# Altium PCB Adattatore.PcbDoc
Units mm, origin at the board's own origin, x right, y up, seen from the top; angles counter-clockwise.
Board outline 89.07 x 85.98 mm, 2 copper layers (Top Layer, Bottom Layer); 14 components, 67 nets, 170 pads, 25 vias.
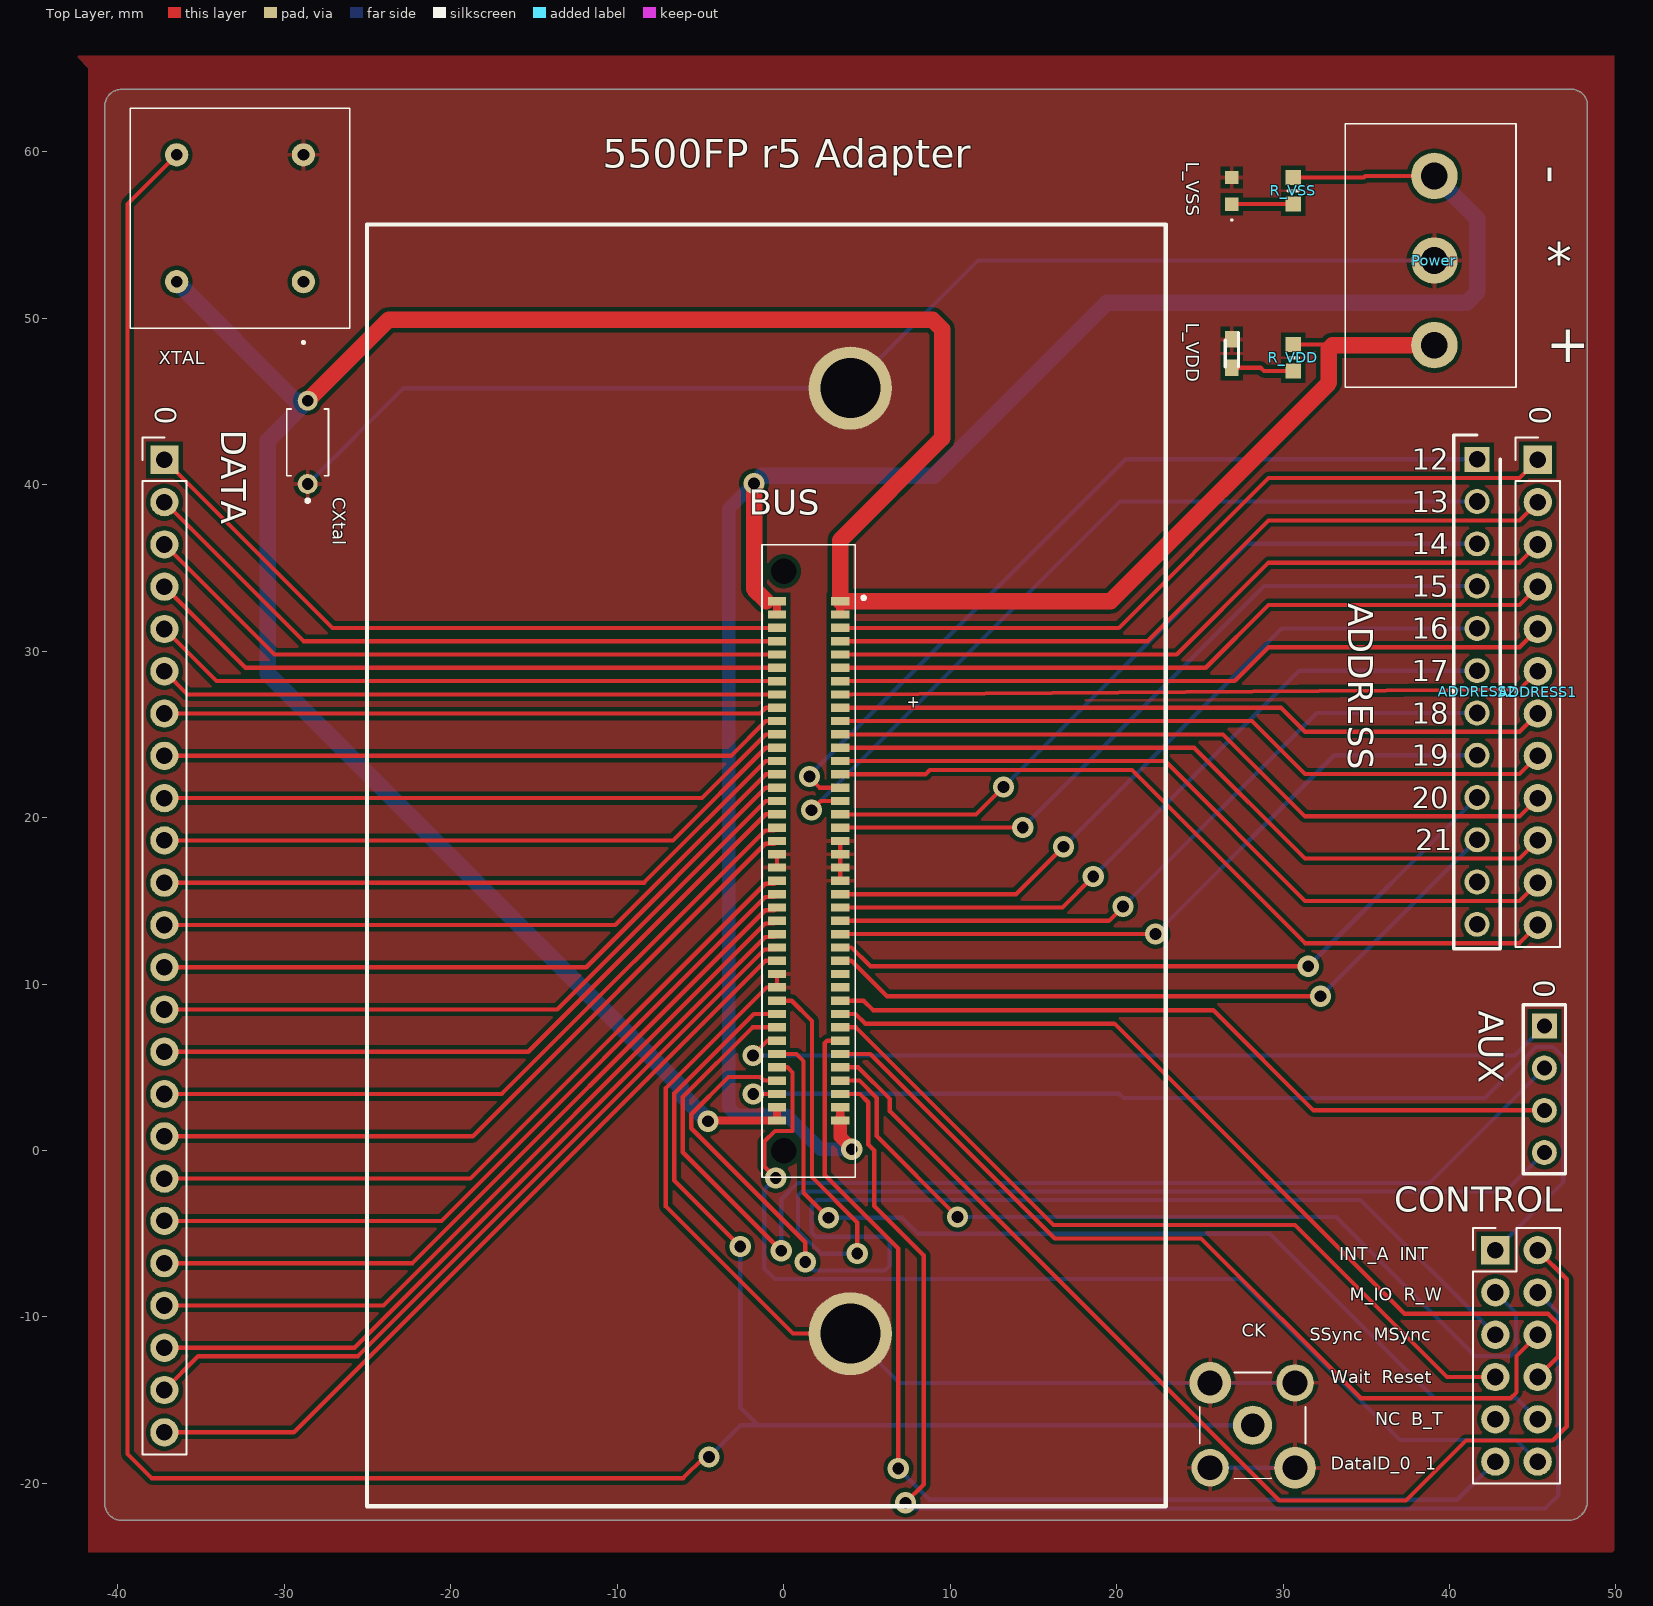
[diagram p0: Top Layer view]
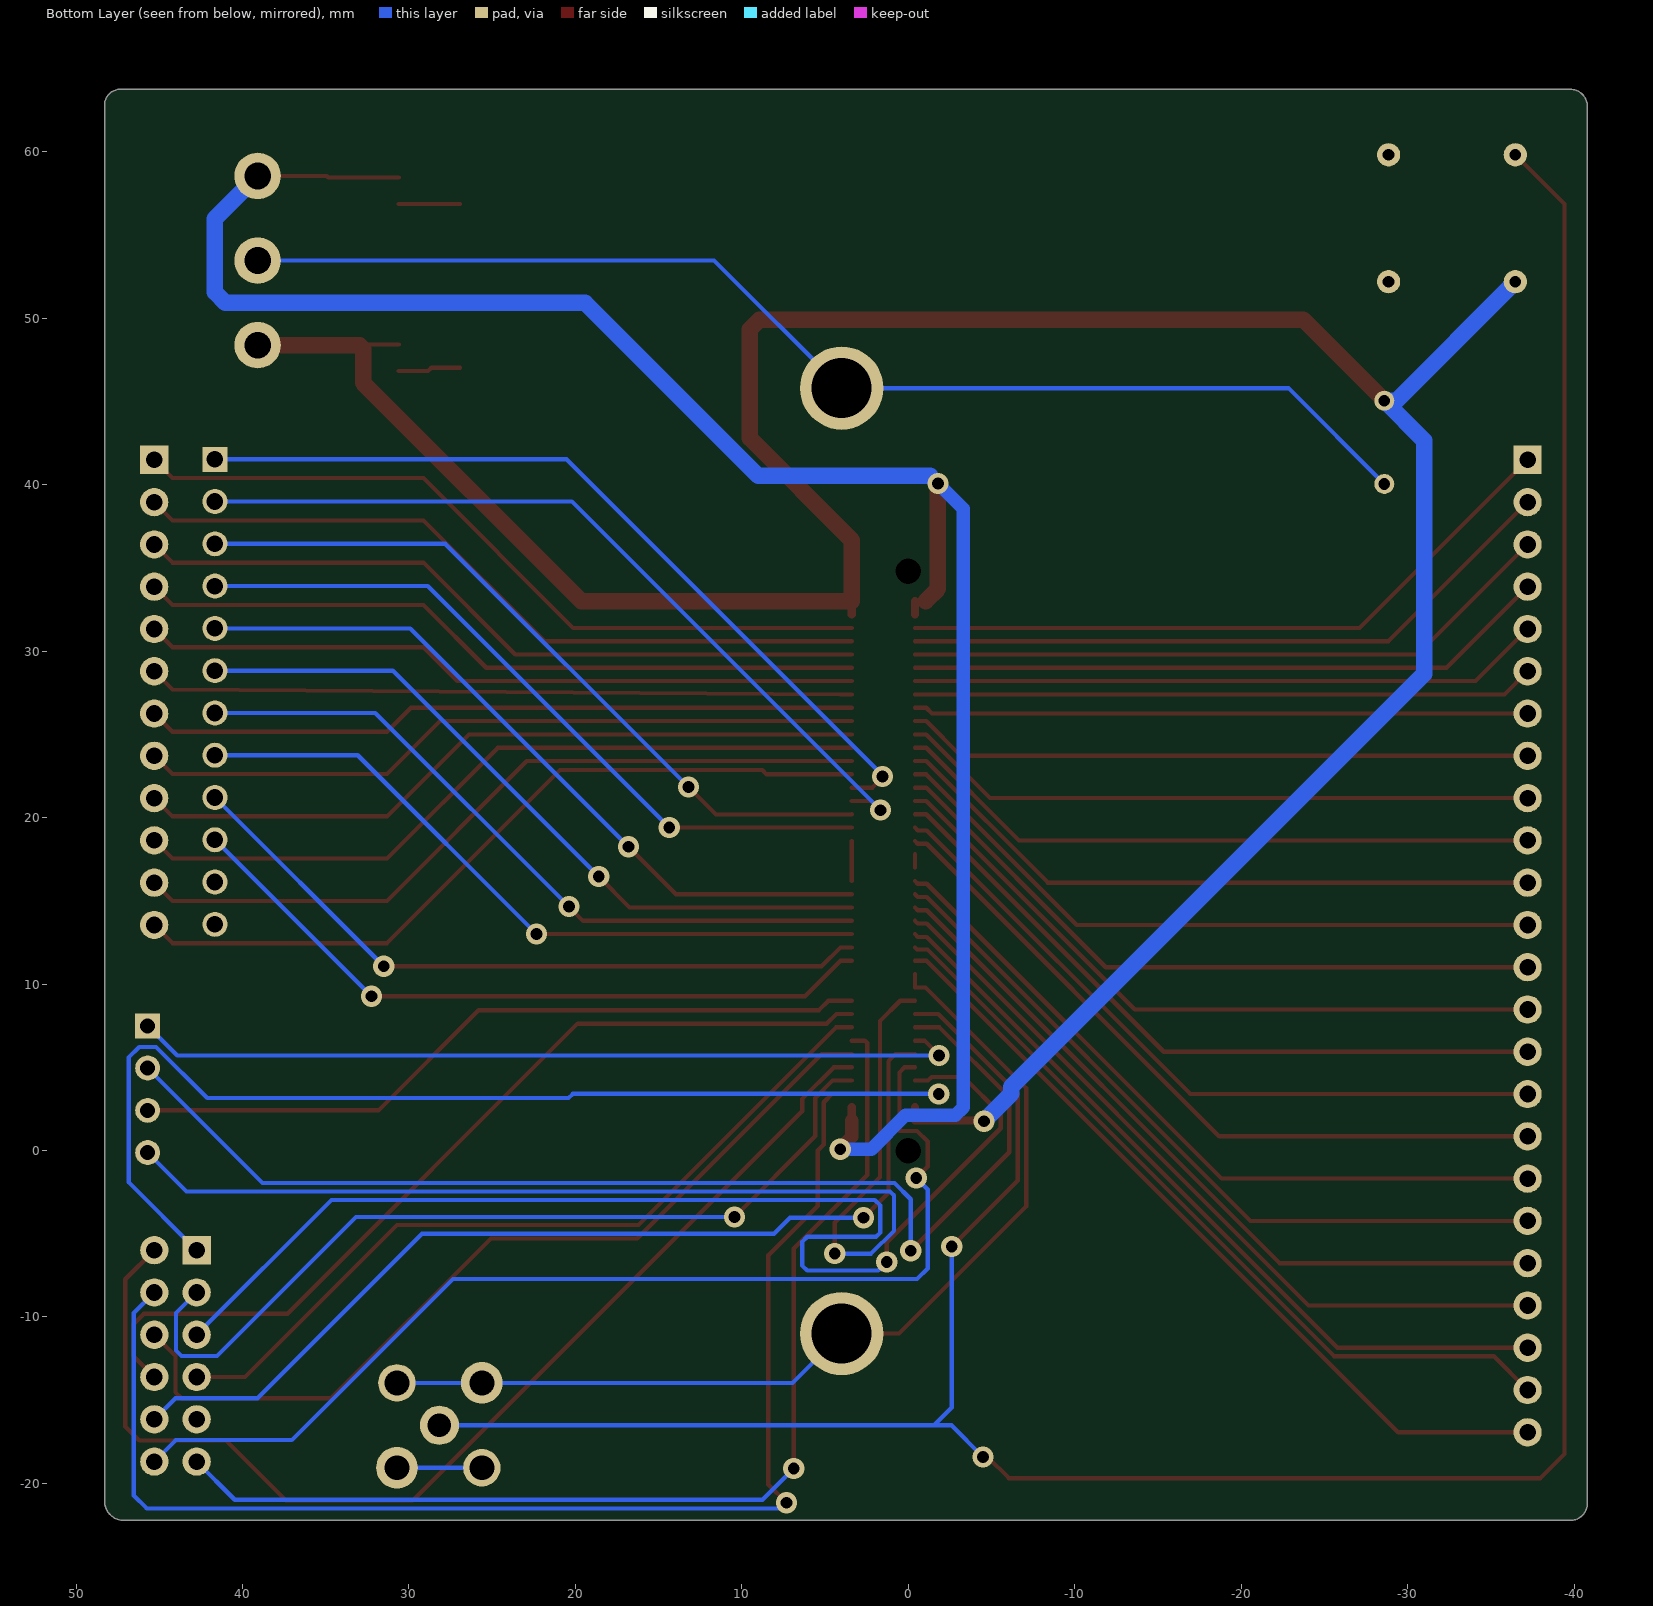
[diagram p1: Bottom Layer view, seen from below]
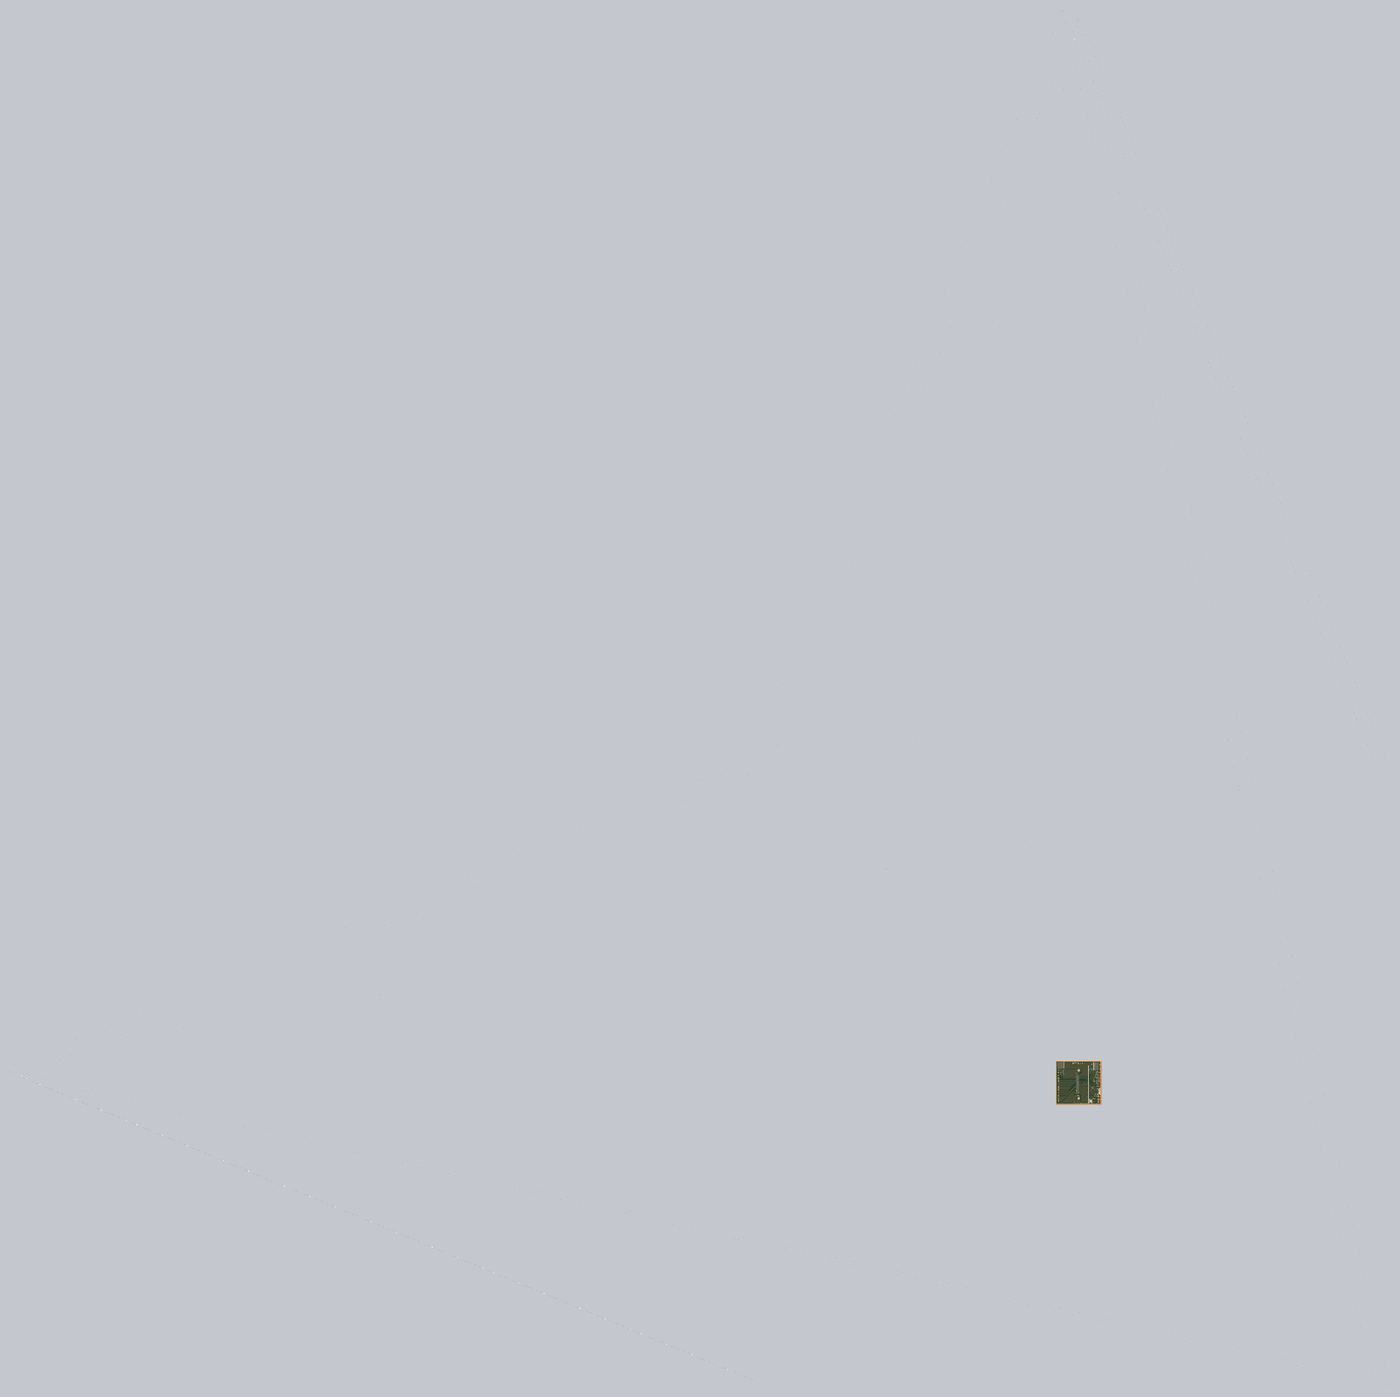
[diagram p2: 3D render of the assembled board from above, using the file's embedded part models]

## Layer stack, top to bottom
Top Solder: solder mask 0.0102, Solder Resist, Dk 3.5
Top Layer: signal copper 0.0356
Dielectric 1: dielectric 0.32, FR-4, Dk 4.8
Bottom Layer: signal copper 0.0356
Bottom Solder: solder mask 0.0102, Solder Resist, Dk 3.5

## Board outline
-40.791,-21.208 -40.791,62.739 cw(c-39.775,62.739) -39.775,63.755 47.225,63.755 cw(c47.332,62.811) 48.276,62.919 48.276,-21.081 cw(c47.133,-21.081) 47.133,-22.224 47.225,-22.224 -39.775,-22.224 cw(c-39.775,-21.208)

## Design rules (kind name [scope] priority, off if disabled: settings)
Clearance [All] p1: gap=0.254 ignorepadtopadclearanceinfootprint=FALSE
MinimumSolderMaskSliver [All] p1: minsoldermaskwidth=0.127
PolygonConnect [All] p1: connectstyle=Relief reliefconductorwidth=0.254 reliefentries=4 polygonreliefangle="90 Angle" airgapwidth=0.254
RoutingTopology [All] p1: topology=Horizontal
RoutingVias [All] p1: holewidth=0.711 width=1.27 viastyle="Through Hole" minholewidth=0.711 minwidth=1.27 maxholewidth=0.711 maxwidth=1.27
SilkToSolderMaskClearance [IsPad] p1: minsilkscreentomaskgap=0.127 clearancetoexposedcopper=TRUE
SolderMaskExpansion [All] p1: expansion=0.102 istentingtop=FALSE
Width [All] p1: maxlimit=0.254 minlimit=0.254 preferedwidth=0.254
27 further rules are at their usual default settings.

## Components (designator, comment, footprint, x,y, rotation, side; value= is the part's Value field where it differs from the comment)
ADDRESS1 "Address BUS" PinHeader_1x12_P2.54mm_Vertical 45.303,41.492 r0 top locked
ADDRESS2 "2312-6111TG" HDRV12W82P0X254_1X12_3048X254X864P 41.656,41.529 r270 top locked
AUX "Header 4" HDR1X4 45.696,7.494 r270 top
BUS "ER8-80P-0.8SV-5H" ER880P08SV5H 1.5,17.4 r270 top
CK "1-1478979-0" 114789790 28.17,-16.522 r0 top
CONTROL "CTRL BUS" PinHeader_2x06_P2.54mm_Vertical 42.753,-5.988 r0 top
CXtal "FA28X8R1E104KNU00" FA28C0G1H822JNU00 -28.599,42.546 r90 top
DATA "Data BUS" PinHeader_1x24_P2.54mm_Vertical -37.207,41.492 r0 top
L_VDD "150060VS55040" LEDM168X50N 26.924,47.879 r270 top
L_VSS "150060SS75003" 150060SS75003 26.924,57.658 r90 top
Power "TB007-508-03BE" TB00750803BE 39.092,48.388 r90 top
R_VDD "CRCW06031K00JNEAC" RESC1608X55N 30.607,47.625 r270 top
R_VSS "CRCW06031K00JNEAC" RESC1608X55N 30.607,57.658 r270 top
XTAL "MXO45HS-3C-25M0000" MXO45HS3C25M0000 -28.853,52.198 r90 top

## Footprints (in the part's own frame and the unit in brackets; to place one, negate y for a bottom-side part, rotate by r counter-clockwise, add the part's x,y. Pads: shape width x height; smd on the part's side, far side on the other; paste and mask are expansions set on the pad)
150060SS75003 [mm]
  rect 0.8x0.8 smd: 1(-0.8,0) 2(0.8,0)
  silkscreen extent -1.8,-0.05 -1.7,0.05, body extent -0.8,-0.4 0.8,0.4, height 0.9
114789790 [mm]
  round 2.504 hole 1.5: 1(-2.55,2.563) 3(2.55,-2.537)
  round 2.25 hole 1.5: 2(2.55,2.563) 4(-2.55,-2.537)
  round 2.354 hole 1.4: 5(0,0.013)
  silkscreen extent -3.17,-3.19 3.18,3.19, body extent -3.17,-3.17 3.17,3.18, height 9.52
ER880P08SV5H [mm]
  rect 0.5x1.1 smd: 1(-15.6,1.9) 2(-15.6,-1.9) 3(-14.8,1.9) 4(-14.8,-1.9) 5(-14,1.9) 6(-14,-1.9) 7(-13.2,1.9) 8(-13.2,-1.9) 9(-12.4,1.9) 10(-12.4,-1.9) 11(-11.6,1.9) 12(-11.6,-1.9) 13(-10.8,1.9) 14(-10.8,-1.9) 15(-10,1.9) 16(-10,-1.9) 17(-9.2,1.9) 18(-9.2,-1.9) 19(-8.4,1.9) 20(-8.4,-1.9) 21(-7.6,1.9) 22(-7.6,-1.9) 23(-6.8,1.9) 24(-6.8,-1.9) 25(-6,1.9) 26(-6,-1.9) 27(-5.2,1.9) 28(-5.2,-1.9) 29(-4.4,1.9) 30(-4.4,-1.9) 31(-3.6,1.9) 32(-3.6,-1.9) 33(-2.8,1.9) 34(-2.8,-1.9) 35(-2,1.9) 36(-2,-1.9) 37(-1.2,1.9) 38(-1.2,-1.9) 39(-0.4,1.9) 40(-0.4,-1.9) 41(0.4,1.9) 42(0.4,-1.9) 43(1.2,1.9) 44(1.2,-1.9) 45(2,1.9) 46(2,-1.9) 47(2.8,1.9) 48(2.8,-1.9) 49(3.6,1.9) 50(3.6,-1.9) 51(4.4,1.9) 52(4.4,-1.9) 53(5.2,1.9) 54(5.2,-1.9) 55(6,1.9) 56(6,-1.9) 57(6.8,1.9) 58(6.8,-1.9) 59(7.6,1.9) 60(7.6,-1.9) 61(8.4,1.9) 62(8.4,-1.9) 63(9.2,1.9) 64(9.2,-1.9) 65(10,1.9) 66(10,-1.9) 67(10.8,1.9) 68(10.8,-1.9) 69(11.6,1.9) 70(11.6,-1.9) 71(12.4,1.9) 72(12.4,-1.9) 73(13.2,1.9) 74(13.2,-1.9) 75(14,1.9) 76(14,-1.9) 77(14.8,1.9) 78(14.8,-1.9) 79(15.6,1.9) 80(15.6,-1.9)
  round 0.765 hole 1.53 unplated: 81(-17.4,-1.5) 82(17.4,-1.5)
  silkscreen extent -19,-2.8 19,3.4, body extent -19,-2.8 19,2.8, height 9.01
FA28C0G1H822JNU00 [mm]
  round 1.2 hole 0.7: 1(-2.5,0) 2(2.5,0)
  silkscreen extent -3.6,-1.25 2,1.25, body extent -2.75,-1.25 2.75,1.25, height 5.6
HDR1X4 [mm] "Connector; Header; 4 Position"
  rect 1.5x1.5 hole 0.9: 1(0,0)
  round 1.5 hole 0.9: 2(2.54,0) 3(5.08,0) 4(7.62,0)
  silkscreen extent -1.27,-1.27 8.89,1.27
HDRV12W82P0X254_1X12_3048X254X864P [mm]
  rect 1.5x1.5 hole 1: 1(0,0)
  round 1.5 hole 1: 2(2.54,0) 3(5.08,0) 4(7.62,0) 5(10.16,0) 6(12.7,0) 7(15.24,0) 8(17.78,0) 9(20.32,0) 10(22.86,0) 11(25.4,0) 12(27.94,0)
  silkscreen extent -1.46,-1.4 29.4,1.4, body extent -1.27,-1.27 29.21,1.27, height 8.64
LEDM168X50N [mm]
  rect 1x0.8 smd: 1(-0.85,0) 2(0.85,0)
  silkscreen extent -1.25,-0.4 0.8,0.4, body extent -0.8,-0.4 0.8,0.4, height 0.4
MXO45HS3C25M0000 [mil]
  round 55 hole 27.56: 1(0,0) 4(300,0) 5(300,300) 8(0,300)
  silkscreen extent -146,-110 410,410, body extent -110,-110 410,410, height 205
PinHeader_1x12_P2.54mm_Vertical [mm]
  rect 1.7x1.7 hole 1 paste-1.7 mask+0: 1(0,0)
  rrect100% 1.7x1.7 hole 1 paste-1.7 mask+0: 2(0,-2.54) 3(0,-5.08) 4(0,-7.62) 5(0,-10.16) 6(0,-12.7) 7(0,-15.24) 8(0,-17.78) 9(0,-20.32) 10(0,-22.86) 11(0,-25.4) 12(0,-27.94)
  silkscreen extent -1.33,-29.27 1.33,1.33
PinHeader_1x24_P2.54mm_Vertical [mm]
  rect 1.7x1.7 hole 1 paste-1.7 mask+0: 1(0,0)
  rrect100% 1.7x1.7 hole 1 paste-1.7 mask+0: 2(0,-2.54) 3(0,-5.08) 4(0,-7.62) 5(0,-10.16) 6(0,-12.7) 7(0,-15.24) 8(0,-17.78) 9(0,-20.32) 10(0,-22.86) 11(0,-25.4) 12(0,-27.94) 13(0,-30.48) 14(0,-33.02) 15(0,-35.56) 16(0,-38.1) 17(0,-40.64) 18(0,-43.18) 19(0,-45.72) 20(0,-48.26) 21(0,-50.8) 22(0,-53.34) 23(0,-55.88) 24(0,-58.42)
  silkscreen extent -1.33,-59.75 1.33,1.33
PinHeader_2x06_P2.54mm_Vertical [mm]
  rect 1.7x1.7 hole 1 paste-1.7 mask+0: 1(0,0)
  rrect100% 1.7x1.7 hole 1 paste-1.7 mask+0: 2(2.54,0) 3(0,-2.54) 4(2.54,-2.54) 5(0,-5.08) 6(2.54,-5.08) 7(0,-7.62) 8(2.54,-7.62) 9(0,-10.16) 10(2.54,-10.16) 11(0,-12.7) 12(2.54,-12.7)
  silkscreen extent -1.33,-14.03 3.87,1.33
RESC1608X55N [mm]
  rect 0.9x0.95 smd: 1(-0.8,0) 2(0.8,0)
  silkscreen extent 0,-0.3 0,0.3, body extent -0.8,-0.4 0.8,0.4, height 0.55
TB00750803BE [mil]
  round 110 hole 62.99: 1(0,0) 2(200,0) 3(400,0)
  silkscreen extent -100,-193 524,211, body extent -100,-193 524,211, height 571

## Part data
ADDRESS1: library part Conn_01x12
ADDRESS2: "Connector", Manufacturer_Name=3M, Mouser Part Number=517-2312-6111TG, Arrow Part Number=2312-6111TG, Arrow Price/Stock=https://www.arrow.com/en/products/2312-6111-tg/3m, Datasheet Link=https://multimedia.3m.com/mws/media/22434O/3mtm-100-in-pin-strip-hdr-straight-ra-solder-tail-ts0766.pdf, Height=8.636mm, Manufacturer_Part_Number=2312-6111TG, Mouser Price/Stock=https://www.mouser.co.uk/ProductDetail/3M-Electronic-Solutions-Division/2312-6111TG?qs=kc%2FM%2FrumzCWny2wIl4PkcA%3D%3D
AUX: "Header, 4-Pin", LatestRevisionDate=17-Jul-2002, LatestRevisionNote="Re-released for DXP Platform.", Publisher="Altium Limited"
BUS: "Connector", Manufacturer_Name=Hirose, Mouser Part Number=798-ER8-80P-0.8SV-5H, Datasheet Link=https://www.hirose.com/product/en/download_file/key_name/ER8-80P-0.8SV-5H/category/Drawing%20(2D)/doc_file_id/142172/?file_category_id=6&item_id=06250029000&is_series=, Height=8.905mm, Manufacturer_Part_Number=ER8-80P-0.8SV-5H, Mouser Price/Stock=https://www.mouser.com/Search/Refine.aspx?Keyword=798-ER8-80P-0.8SV-5H
CK: "Connector", Manufacturer_Name="TE Connectivity", Mouser Part Number=571-1-1478979-0, Arrow Part Number=1-1478979-0, Arrow Price/Stock=https://www.arrow.com/en/products/1-1478979-0/te-connectivity, Datasheet Link=http://www.te.com/commerce/DocumentDelivery/DDEController?Action=showdoc&DocId=Customer+Drawing%7F1478979%7FB%7Fpdf%7FEnglish%7FENG_CD_1478979_B.pdf%7F1-1478979-0, Height=10mm, Manufacturer_Part_Number=1-1478979-0, Mouser Price/Stock=https://www.mouser.co.uk/ProductDetail/TE-Connectivity/1-1478979-0?qs=Vcr9%2FL0R50jLfIYfi0kfuw%3D%3D
CONTROL: library part Conn_02x06_Odd_Even, CONTROL="CTRL BUS"
CXtal: "Capacitor", Manufacturer_Name=TDK, Mouser Part Number=810-FA28X8R1E10400, Datasheet Link=https://product.tdk.com/info/en/catalog/datasheets/leadmlcc_halogenfree_fa150_en.pdf, Height=5.5mm, Manufacturer_Part_Number=FA28X8R1E104KNU00, Mouser Price/Stock=https://www.mouser.co.uk/ProductDetail/TDK/FA28X8R1E104KNU00?qs=zFwFjAF3uahucuORXrjx8w%3D%3D
DATA: library part Conn_01x24
L_VDD: "LED", Manufacturer_Name="Wurth Elektronik", Mouser Part Number=710-150060VS55040, Datasheet Link=https://katalog.we-online.com/led/datasheet/150060VS55040.pdf, Height=0.5mm, Manufacturer_Part_Number=150060VS55040, Mouser Price/Stock=https://www.mouser.co.uk/ProductDetail/Wurth-Elektronik/150060VS55040?qs=8Aam6%252B7C6HEumg%252B0cJZzvA%3D%3D
L_VSS: "LED", Manufacturer_Name="Wurth Elektronik", Mouser Part Number=710-150060SS75003, Datasheet Link=https://www.we-online.com/catalog/datasheet/150060SS75003.pdf, Height=0.8mm, Manufacturer_Part_Number=150060SS75003, Mouser Price/Stock=https://www.mouser.co.uk/ProductDetail/Wurth-Elektronik/150060SS75003?qs=Li%252BoUPsLEntNiRmIe%252Bnzlg%3D%3D
Power: "Connector", Manufacturer_Name="CUI Inc.", Mouser Part Number=490-TB007-508-03BE, Arrow Part Number=TB007-508-03BE, Arrow Price/Stock=https://www.arrow.com/en/products/tb007-508-03be/cui-devices?region=nac, Datasheet Link=https://eu.mouser.com/datasheet/2/670/tb007_508-1550621.pdf, Height=14.4mm, Manufacturer_Part_Number=TB007-508-03BE, Mouser Price/Stock=https://www.mouser.co.uk/ProductDetail/CUI-Devices/TB007-508-03BE?qs=vLWxofP3U2zHYiGqNs1vAA%3D%3D
R_VDD R_VSS: "Resistor", Manufacturer_Name=Vishay, Mouser Part Number=71-CRCW06031K00JNEAC, Arrow Part Number=CRCW06031K00JNEAC, Arrow Price/Stock=https://www.arrow.com/en/products/crcw06031k00jneac/vishay?region=nac, Datasheet Link=http://www.vishay.com/docs/28773/crcwce3.pdf, Height=0.55mm, Manufacturer_Part_Number=CRCW06031K00JNEAC, Mouser Price/Stock=https://www.mouser.co.uk/ProductDetail/Vishay-Dale/CRCW06031K00JNEAC?qs=E3Y5ESvWgWPM5t3DlmyFHQ%3D%3D
XTAL: "Crystal or Oscillator", Manufacturer_Name=CTS, Mouser Part Number=774-MXO45HS-3C-25.0, Arrow Part Number=MXO45HS-3C-25M0000, Arrow Price/Stock=https://www.arrow.com/en/products/mxo45hs-3c-25m0000/cts, Datasheet Link=http://www.ctscorp.com/wp-content/uploads/MXO45.pdf, Height=5.1mm, Manufacturer_Part_Number=MXO45HS-3C-25M0000, Mouser Price/Stock=https://www.mouser.com/Search/Refine.aspx?Keyword=774-MXO45HS-3C-25.0

## Free pads (board coordinates)
  round 5 hole 3.6: 12(4,-11) 12(4,45.8)

## Via types
v1: diameter 1.27, hole 0.711, Top Layer to Bottom Layer, 25 vias

## Nets (pads, with @x,y where several pads share a name; then routed paths per layer and width w, separated by ;. In a path a pad name is that pad's centre, name@x,y a point inside that pad or via, vN(x,y) a via of type N, cw(c..) or ccw(c..) an arc to the next point about the centre after c; other vN are vias at no path point)
A0: ADDRESS1.1 BUS.5 | length 46.1
  Top Layer w0.254: BUS.5 20.134,31.4 29.132,40.398 44.208,40.398 ADDRESS1.1
A12: ADDRESS2.1 BUS.29 | length 50.3
  Top Layer w0.254: v1(1.547,22.479) 1.476,22.479 2.155,21.8 BUS.29
  Bottom Layer w0.254: v1@1.511,22.515 20.526,41.529 ADDRESS2.1
A13: ADDRESS2.2 BUS.31 | length 49.6
  Top Layer w0.254: v1(1.672,20.447) 2.225,21 BUS.31
  Bottom Layer w0.254: v1(1.672,20.447) 20.214,38.989 ADDRESS2.2
A14: ADDRESS2.3 BUS.33 | length 45
  Top Layer w0.254: BUS.33 3.407,20.193 11.558,20.193 v1(13.209,21.843)
  Bottom Layer w0.254: v1(13.209,21.843) 27.814,36.449 ADDRESS2.3
A15: ADDRESS2.4 BUS.35 | length 44.3
  Top Layer w0.254: BUS.35 v1(14.357,19.4)
  Bottom Layer w0.254: v1(14.357,19.4) 28.866,33.909 ADDRESS2.4
A21: ADDRESS2.10 BUS.55 | length 43
  Top Layer w0.254: BUS.55 4.077,11.4 6.206,9.271 v1(32.258,9.271)
  Bottom Layer w0.254: v1(32.258,9.271) ADDRESS2.10
B_T: BUS.70 CONTROL.10 | length 59.4
  Top Layer w0.254: BUS.70 0.763,5.8 1.195,5.368 1.195,-2.539 v1(2.694,-4.038)
  Bottom Layer w0.254: v1(2.694,-4.038) 7.107,-4.038 8.072,-5.003 29.211,-5.003 39.092,-14.883 44.029,-14.883 CONTROL.10
D0: BUS.6 DATA.1 | length 41
  Top Layer w0.254: DATA.1 -27.115,31.4 BUS.6
DATAID0: BUS.67 CONTROL.11 | length 66
  Top Layer w0.254: BUS.67 2.613,6.6 2.465,6.453 2.465,-1.472 6.885,-5.892 v1(6.885,-19.1)
  Bottom Layer w0.254: v1(6.885,-19.1) 8.764,-20.979 40.461,-20.979 CONTROL.11
GND: BUS.37 BUS.39 BUS.40 BUS.41 BUS.42 BUS.43 BUS.58 BUS.60 CK.1 CK.2 CK.3 CK.4 CXtal.1 L_VDD.1 L_VSS.2 pad.12 Power.2 XTAL.4 | length 140.8
  Top Layer w0.254: BUS.58 BUS.60 -1.04,9.8 -7.081,3.759 -7.081,-3.362 0.556,-11 pad.12@4,-11 ; BUS.42 BUS.40 ; BUS.43 BUS.41 BUS.39 BUS.37
  Bottom Layer w0.254: CXtal.1 -22.845,45.8 4,45.8 11.668,53.468 Power.2 ; pad.12@4,-11 6.959,-13.959 CK.1 CK.2 ; CK.4 CK.3
INT: BUS.71 CONTROL.2 | length 68
  Top Layer w0.254: BUS.71 4.472,5 6.377,3.095 6.377,2.363 29.77,-21.03 37.39,-21.03 40.997,-17.423 46.204,-17.423 47.042,-16.585 47.042,-7.737 CONTROL.2
INT_A: BUS.76 CONTROL.1 | length 65
  Top Layer w0.254: v1(-1.827,3.406) -1.825,3.403 -0.403,3.403 BUS.76
  Bottom Layer w0.254: v1(-1.827,3.406) 20.154,3.406 20.409,3.151 42.115,3.151 45.188,6.224 46.204,6.224 46.839,5.589 46.839,-1.901 CONTROL.1
M_IO: BUS.73 CONTROL.3 | length 52.9
  Top Layer w0.254: BUS.73 4.553,4.2 5.592,3.161 5.592,0.871 v1(10.45,-3.987)
  Bottom Layer w0.254: v1(10.45,-3.987) 33.174,-3.987 41.53,-12.343 43.664,-12.343 43.994,-12.013 43.994,-9.769 CONTROL.3
MSync: BUS.69 CONTROL.6 | length 53.3
  Top Layer w0.254: BUS.69 5.201,5.8 16.283,-5.282 25.071,-5.282 34.672,-14.883 43.664,-14.883 44.02,-14.528 44.02,-12.341 CONTROL.6
NetADDRESS1_2: ADDRESS1.2 BUS.7 | length 45.4
  Top Layer w0.254: BUS.7 21.874,30.6 29.132,37.858 44.208,37.858 ADDRESS1.2
NetADDRESS1_3: ADDRESS1.3 BUS.9 | length 44.6
  Top Layer w0.254: BUS.9 23.614,29.8 29.132,35.318 44.208,35.318 ADDRESS1.3
NetADDRESS1_4: ADDRESS1.4 BUS.11 | length 43.9
  Top Layer w0.254: BUS.11 25.354,29 29.132,32.778 44.208,32.778 ADDRESS1.4
NetADDRESS1_5: ADDRESS1.5 BUS.13 | length 43.2
  Top Layer w0.254: BUS.13 27.094,28.2 29.132,30.238 44.208,30.238 ADDRESS1.5
NetADDRESS1_6: ADDRESS1.6 BUS.15 | length 42.4
  Top Layer w0.254: BUS.15 4.077,27.4 44.208,27.698 ADDRESS1.6
NetADDRESS1_7: ADDRESS1.7 BUS.17 | length 43
  Top Layer w0.254: BUS.17 29.878,26.6 31.32,25.158 44.208,25.158 ADDRESS1.7
NetADDRESS1_8: ADDRESS1.8 BUS.19 | length 43.7
  Top Layer w0.254: BUS.19 28.138,25.8 31.32,22.618 44.208,22.618 ADDRESS1.8
NetADDRESS1_9: ADDRESS1.9 BUS.21 | length 44.4
  Top Layer w0.254: BUS.21 26.398,25 31.32,20.078 44.208,20.078 ADDRESS1.9
NetADDRESS1_10: ADDRESS1.10 BUS.23 | length 45.1
  Top Layer w0.254: BUS.23 24.658,24.2 31.32,17.538 44.208,17.538 ADDRESS1.10
NetADDRESS1_11: ADDRESS1.11 BUS.25 | length 45.8
  Top Layer w0.254: BUS.25 22.918,23.4 31.32,14.998 44.208,14.998 ADDRESS1.11
NetADDRESS1_12: ADDRESS1.12 BUS.27 | length 46.8
  Top Layer w0.254: BUS.27 8.515,22.6 8.774,22.859 20.919,22.859 31.32,12.458 44.208,12.458 ADDRESS1.12
NetADDRESS2_5: ADDRESS2.5 BUS.45 | length 44.9
  Top Layer w0.254: BUS.45 13.949,15.4 v1(16.801,18.251)
  Bottom Layer w0.254: v1(16.801,18.251) 29.919,31.369 ADDRESS2.5
NetADDRESS2_6: ADDRESS2.6 BUS.47 | length 44.1
  Top Layer w0.254: BUS.47 16.742,14.6 v1(18.597,16.455)
  Bottom Layer w0.254: v1(18.597,16.455) 30.971,28.829 ADDRESS2.6
NetADDRESS2_7: ADDRESS2.7 BUS.49 | length 43.4
  Top Layer w0.254: BUS.49 19.534,13.8 v1(20.393,14.659)
  Bottom Layer w0.254: v1(20.393,14.659) 32.023,26.289 ADDRESS2.7
NetADDRESS2_8: ADDRESS2.8 BUS.51 | length 42.7
  Top Layer w0.254: BUS.51 v1(22.326,13)
  Bottom Layer w0.254: v1(22.326,13) 33.075,23.749 ADDRESS2.8
NetADDRESS2_9: ADDRESS2.9 BUS.53 | length 42.9
  Top Layer w0.254: BUS.53 4.077,12.2 5.21,11.067 v1(31.514,11.067)
  Bottom Layer w0.254: v1(31.514,11.067) ADDRESS2.9
NetAUX_1: AUX.1 BUS.68 | length 50.1
  Top Layer w0.254: v1(-1.853,5.716) -0.969,6.6 BUS.68
  Bottom Layer w0.254: v1(-1.853,5.716) 43.918,5.716 AUX.1
NetAUX_2: AUX.2 BUS.66 | length 71.3
  Top Layer w0.254: BUS.66 -1.878,7.4 -6.065,3.213 -6.065,-0.105 v1(-0.151,-6.019)
  Bottom Layer w0.254: v1(-0.151,-6.019) -0.151,-2.925 0.825,-1.949 38.793,-1.949 AUX.2
NetAUX_3: AUX.3 BUS.61 | length 45
  Top Layer w0.254: BUS.61 4.802,9 5.368,8.434 25.808,8.434 31.828,2.414 AUX.3
NetAUX_4: AUX.4 BUS.62 | length 69.9
  Top Layer w0.254: BUS.62 0.484,9 1.703,7.781 1.703,-1.599 4.421,-4.317 v1(4.421,-6.197)
  Bottom Layer w0.254: v1(4.421,-6.197) 2.237,-6.197 0.865,-4.825 0.865,-2.694 1.102,-2.457 43.365,-2.457 AUX.4
NetBUS_8: BUS.8 DATA.2 | length 40.3
  Top Layer w0.254: DATA.2 -28.855,30.6 BUS.8
NetBUS_10: BUS.10 DATA.3 | length 39.5
  Top Layer w0.254: DATA.3 -30.595,29.8 BUS.10
NetBUS_12: BUS.12 DATA.4 | length 38.8
  Top Layer w0.254: DATA.4 -32.335,29 BUS.12
NetBUS_14: BUS.14 DATA.5 | length 38.1
  Top Layer w0.254: DATA.5 -34.075,28.2 BUS.14
NetBUS_16: BUS.16 DATA.6 | length 37.4
  Top Layer w0.254: DATA.6 -35.815,27.4 BUS.16
NetBUS_18: BUS.18 DATA.7 | length 37
  Top Layer w0.254: DATA.7 -1.425,26.252 -1.077,26.6 BUS.18
NetBUS_20: BUS.20 DATA.8 | length 37.7
  Top Layer w0.254: DATA.8 -3.165,23.712 -1.077,25.8 BUS.20
NetBUS_22: BUS.22 DATA.9 | length 38.4
  Top Layer w0.254: DATA.9 -4.905,21.172 -1.077,25 BUS.22
NetBUS_24: BUS.24 DATA.10 | length 39.1
  Top Layer w0.254: DATA.10 -6.645,18.632 -1.077,24.2 BUS.24
NetBUS_26: BUS.26 DATA.11 | length 39.8
  Top Layer w0.254: DATA.11 -8.385,16.092 -1.077,23.4 BUS.26
NetBUS_28: BUS.28 DATA.12 | length 40.6
  Top Layer w0.254: DATA.12 -10.125,13.552 -1.077,22.6 BUS.28
NetBUS_30: BUS.30 DATA.13 | length 41.3
  Top Layer w0.254: DATA.13 -11.865,11.012 -1.077,21.8 BUS.30
NetBUS_32: BUS.32 DATA.14 | length 42
  Top Layer w0.254: DATA.14 -13.605,8.472 -1.077,21 BUS.32
NetBUS_34: BUS.34 DATA.15 | length 42.7
  Top Layer w0.254: DATA.15 -15.345,5.932 -1.077,20.2 BUS.34
NetBUS_36: BUS.36 DATA.16 | length 43.4
  Top Layer w0.254: DATA.16 -16.947,3.392 -1.108,19.231 -0.569,19.231 BUS.36
NetBUS_38: BUS.38 DATA.17 | length 44.2
  Top Layer w0.254: DATA.17 -18.687,0.852 -1.108,18.431 -0.569,18.431 BUS.38
NetBUS_44: BUS.44 DATA.18 | length 44.2
  Top Layer w0.254: DATA.18 -18.827,-1.688 -1.108,16.031 -0.569,16.031 BUS.44
NetBUS_46: BUS.46 DATA.19 | length 44.9
  Top Layer w0.254: DATA.19 -20.567,-4.228 -1.108,15.231 -0.569,15.231 BUS.46
NetBUS_48: BUS.48 DATA.20 | length 45.7
  Top Layer w0.254: DATA.20 -22.307,-6.768 -1.108,14.431 -0.569,14.431 BUS.48
NetBUS_50: BUS.50 DATA.21 | length 46.4
  Top Layer w0.254: DATA.21 -24.047,-9.308 -1.108,13.631 -0.569,13.631 BUS.50
NetBUS_52: BUS.52 DATA.22 | length 47.1
  Top Layer w0.254: DATA.22 -25.787,-11.848 -1.108,12.831 -0.569,12.831 BUS.52
NetBUS_54: BUS.54 DATA.23 | length 47.8
  Top Layer w0.254: DATA.23 -35.175,-12.356 -25.576,-12.356 -1.147,12.073 -0.527,12.073 BUS.54
NetBUS_56: BUS.56 DATA.24 | length 48.5
  Top Layer w0.254: DATA.24 -29.43,-16.928 -1.102,11.4 BUS.56
NetBUS_64: BUS.64 CK.5 XTAL.5 | length 179
  Top Layer w0.254: XTAL.5 -39.426,56.865 -39.426,-18.232 -37.973,-19.685 -6.04,-19.685 -4.769,-18.414 v1(-4.494,-18.414) ; v1(-2.615,-5.765) -6.573,-1.806 -6.573,3.423 -1.797,8.2 BUS.64
  Bottom Layer w0.254: v1(-4.494,-18.414) -2.589,-16.509 -1.548,-16.509 ; v1(-2.615,-5.765) -2.615,-15.442 -1.548,-16.509 ; CK.5 -1.548,-16.509
NetBUS_72: BUS.72 CONTROL.12 | length 66
  Top Layer w0.254: v1(-0.481,-1.65) -1.167,-0.964 -1.167,0.534 -0.532,1.169 0.535,1.169 0.535,4.695 0.23,5 BUS.72
  Bottom Layer w0.254: v1(-0.481,-1.65) -1.167,-2.336 -1.167,-7.086 -0.532,-7.721 27.357,-7.721 37.035,-17.398 44.003,-17.398 CONTROL.12
NetL_VDD_2: L_VDD.2 R_VDD.2 | length 3.8
  Top Layer w0.254: L_VDD.2 28.653,47.029 28.857,46.825 R_VDD.2
NetL_VSS_1: L_VSS.1 R_VSS.2 | length 3.7
  Top Layer w0.254: L_VSS.1 R_VSS.2
Reset: BUS.63 CONTROL.8 | length 54.6
  Top Layer w0.254: BUS.63 4.319,8.2 4.898,7.621 19.864,7.621 37.289,-9.803 45.925,-9.803 46.534,-10.413 46.534,-12.366 CONTROL.8
RW: BUS.75 CONTROL.4 | length 80.2
  Top Layer w0.254: BUS.75 4.578,3.4 5.081,2.897 5.081,0.357 5.437,0.001 5.437,-3.326 8.409,-6.298 8.409,-20.065 v1(7.317,-21.157)
  Bottom Layer w0.254: v1(7.317,-21.157) 7.672,-21.513 45.747,-21.513 46.534,-20.725 46.534,-9.769 CONTROL.4
SSYNC: BUS.74 CONTROL.5 | length 75.9
  Top Layer w0.254: BUS.74 -1.185,4.2 -1.407,4.422 -3.318,4.422 -5.557,2.183 -5.557,1.341 1.297,-5.513 v1(1.297,-6.705)
  Bottom Layer w0.254: v1(1.297,-6.705) 1.805,-7.213 6.072,-7.213 6.377,-6.908 6.377,-5.485 6.072,-5.181 1.939,-5.181 1.678,-4.919 1.678,-3.301 2.014,-2.965 34.65,-2.965 CONTROL.5
VDD: BUS.1 BUS.3 BUS.78 BUS.80 CXtal.2 Power.1 R_VDD.1 XTAL.8 | length 176.6
  Top Layer w0.254: R_VDD.1 32.486,48.425 32.751,48.16 32.968,48.377
  Top Layer w0.5: v1(-4.541,1.762) -4.503,1.8 BUS.80 BUS.78 ; BUS.3 BUS.1
  Top Layer w1: CXtal.2 -23.734,49.911 8.939,49.911 9.525,49.325 9.525,42.799 3.4,36.674 BUS.1 19.635,33 32.751,46.116 32.751,48.16 ; 32.968,48.377 36.703,48.377 Power.1@39.081,48.377
  Bottom Layer w1: XTAL.8 -29.321,45.046 CXtal.2 -30.988,42.657 -30.988,28.628 -6.195,3.835 -6.195,3.415 v1(-4.541,1.762)
VSS: BUS.2 BUS.4 BUS.77 BUS.79 Power.3 R_VSS.1 | length 123
  Top Layer w0.254: -1.04,33 BUS.2 ; v1(4.091,0.077) v1@4.091,0.132 ; R_VSS.1 34.85,58.458 34.94,58.548 Power.3
  Top Layer w0.5: BUS.4 BUS.2 ; BUS.79 BUS.77
  Top Layer w0.8: BUS.79 3.4,0.823 v1@4.091,0.132
  Top Layer w1: v1(-1.781,40.078) -1.781,33.741 -1.04,33
  Bottom Layer w0.254: v1(-1.781,40.078) -1.319,40.539
  Bottom Layer w0.8: v1(-1.781,40.078) -3.302,38.557 -3.302,2.585 -2.833,2.117 0.169,2.117 2.209,0.077 v1(4.091,0.077)
  Bottom Layer w1: -1.319,40.539 9.018,40.539 19.407,50.928 41.022,50.928 41.656,51.562 41.656,55.984 Power.3
WAIT: BUS.65 CONTROL.7 | length 48.1
  Top Layer w0.254: BUS.65 4.345,7.4 16.214,-4.469 30.71,-4.469 39.848,-13.608 CONTROL.7
pads on no net: ADDRESS2.11 ADDRESS2.12 BUS.57 BUS.59 BUS.81 BUS.82 CONTROL.9 XTAL.1

## Polygon pours and split planes (outlines as drawn)
GND on Top Layer "GND_L01_P000" (solid, pour order 0): -42.545,65.786 49.911,65.786 49.911,-24.003 49.784,-24.13 -41.783,-24.13 -41.783,65.024

## Silkscreen, mask and mechanical layers (free items; w line width, h text height)
Top Overlay:
  lines w0.254: -25.043,-21.373 22.957,-21.373 22.957,55.627 -25.043,55.627 -25.043,-21.373
  text "-" at 45.188,59.183 h2.29 r270
  text "5500FP r5 Adapter" at -10.876,59.032 h1.7
  text "*" at 45.823,52.262 h2.29
  text "+" at 45.823,47.372 h2.29
  text "0" at -37.743,44.705 h1.27 r270
  text "0" at 44.807,44.705 h1.27 r270
  text "12" at 37.719,40.894 h1.27
  text "13" at 37.719,38.353 h1.27
  text "14" at 37.719,35.813 h1.27
  text "15" at 37.719,33.272 h1.27
  text "ADDRESS" at 33.909,32.893 h1.52 r270
  text "16" at 37.719,30.732 h1.27
  text "17" at 37.719,28.191 h1.27
  text "+" at 7.393,26.608 h0.7
  text "18" at 37.719,25.651 h1.27
  text "19" at 37.719,23.11 h1.27
  text "20" at 37.719,20.569 h1.27
  text "21" at 37.931,18.029 h1.27
  text "0" at 45.05,10.255 h1.27 r270
  text "INT_A  INT" at 33.377,-6.603 h0.76
  text "M_IO  R_W" at 34.012,-9.016 h0.76
  text "SSync  MSync" at 31.599,-11.429 h0.76
  text "Wait  Reset" at 32.869,-13.969 h0.76
  text "NC  B_T" at 35.536,-16.509 h0.76
  text "DataID_0 _1" at 32.869,-19.176 h0.76
Mechanical 1:
  lines w0.254: -40.791,62.739 cw(c-39.775,62.739) -39.775,63.755 47.225,63.755 cw(c47.332,62.811) 48.276,62.919 48.276,-21.081 cw(c47.133,-21.081) 47.133,-22.224 ; -40.791,62.792 -40.791,-21.208 ccw(c-39.775,-21.208) -39.775,-22.224 47.225,-22.224

## Text inside footprints (layer, text, board x,y; h text height)
ADDRESS1: Mechanical 6 "J11" at 45.953,26.52 h0.7 r90
CONTROL: Mechanical 6 "J1" at 44.673,-12.973 h0.7 r90
DATA: Mechanical 6 "J16" at -36.557,11.09 h0.7 r90